# EAGLE board MTRduino_rev5.1 (EAGLE 7.2.0)
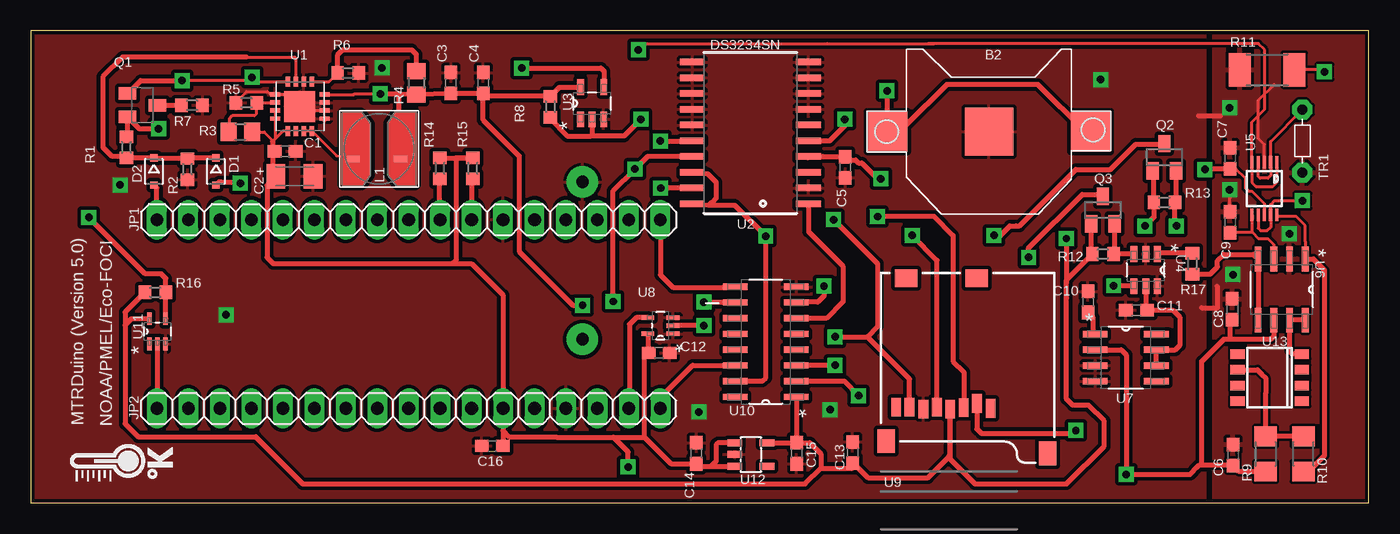
[diagram p0: board, top side]
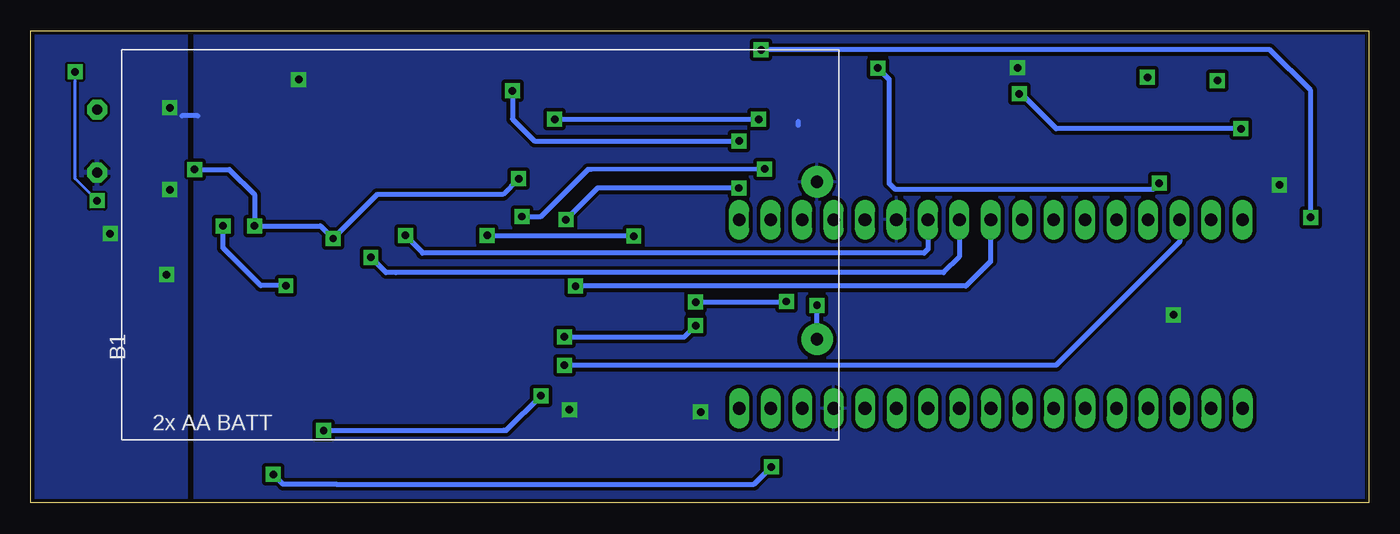
[diagram p1: board, bottom side, seen from below]

Size 107.95 x 38.1 mm. Coordinates in mm from the lower left corner, seen from the top.
Outline: 0,0 107.95,0 107.95,38.1 0,38.1 0,0
Copper layers (1*16): Top 0.035mm / dielectric 1.5mm / Bottom 0.035mm
Design rules "default *": minimum track width 8mil, minimum drill 20mil, track to track 8mil, track to pad 8mil, pad to pad 8mil, via to via 10mil, smd to smd 8mil, copper to edge 12mil, drill to drill 12mil, minimum pad ring 12mil, minimum via ring 12mil, stop-mask expansion 4mil, vias tented up to drill 0mil, thermal gap 10mil

## Footprints (pad centres in the part's own frame; a part is rotated, then mirrored left to right if it is on the bottom)
BATT_AA2 = drill 1 pad 2.54: + -27.178,7.62; - -27.178,-5.08
CR1220-SMD = smd 3.2 x 3.2: +$1 -8.2,0; +$2 8.2,0 | smd 3.9 x 3.9: - 0,0
C0603 = smd 1.1 x 1: 1 -0.85,0; 2 0.85,0
C1206K = smd 1.5 x 2: 1 -1.5,0; 2 1.5,0
SOD323-R = smd 0.6 x 0.6: A 1.1,0; C -1.1,0
1X17 = drill 1.016 long: 1 -20.32,0; 2 -17.78,0; 3 -15.24,0; 4 -12.7,0; 5 -10.16,0; 6 -7.62,0; 7 -5.08,0; 8 -2.54,0; 9 0,0; 10 2.54,0; 11 5.08,0; 12 7.62,0; 13 10.16,0; 14 12.7,0; 15 15.24,0; 16 17.78,0; 17 20.32,0
VLC6045 = smd 1.016 x 0.508: P$2 1.27,3.81; P$3 5.08,3.81
SC59-BEC = smd 1 x 1.4: B -0.95,-1.2; C 0,1.2; E 0.95,-1.2
SOT23 = smd 1 x 1.4: 1 -0.95,-1.1; 2 0.95,-1.1; 3 0,1.1
R0603 = smd 1 x 1.1: 1 -0.85,0; 2 0.85,0
R0805 = smd 1.3 x 1.5: 1 -0.95,0; 2 0.95,0
R1206 = smd 1.6 x 1.803: 1 -1.422,0; 2 1.422,0
R2010 = smd 1.8 x 2.7: 1 -2.2,0; 2 2.2,0
R-5 = drill 0.813 pad 1.6 octagon: 1 -2.54,0; 2 2.54,0
QFN16-4X4 = smd 0.8 x 0.35: 1 -2,0.975; 2 -2,0.325; 3 -2,-0.325; 4 -2,-0.975; 9 2,-0.975; 10 2,-0.325; 11 2,0.325; 12 2,0.975 | smd 0.35 x 0.8: 5 -0.975,-2; 6 -0.325,-2; 7 0.325,-2; 8 0.975,-2; 13 0.975,2; 14 0.325,2; 15 -0.325,2; 16 -0.975,2 | smd 2.5 x 2.5: EXP 0,0
DS3234 = smd 0.53 x 1.98: 1 -5.715,-4.685; 2 -4.445,-4.685; 3 -3.175,-4.685; 4 -1.905,-4.685; 5 -0.635,-4.685; 6 0.635,-4.685; 7 1.905,-4.685; 8 3.175,-4.685; 9 4.445,-4.685; 10 5.715,-4.685; 11 5.715,4.685; 12 4.445,4.685; 13 3.175,4.685; 14 1.905,4.685; 15 0.635,4.685; 16 -0.635,4.685; 17 -1.905,4.685; 18 -3.175,4.685; 19 -4.445,4.685; 20 -5.715,4.685
SOT95P280X145-5N = smd 1.27 x 0.559: 1 -1.295,0.94; 2 -1.295,0; 3 -1.295,-0.94; 4 1.295,-0.94; 5 1.295,0.94
SOT95P280X145-6N = smd 1.27 x 0.559: 1 -1.295,0.94; 2 -1.295,0; 3 -1.295,-0.94; 4 1.295,-0.94; 5 1.295,0; 6 1.295,0.94
MSOP10 = smd 0.25 x 1: 1 -1,-2.113; 2 -0.5,-2.113; 3 0,-2.113; 4 0.5,-2.113; 5 1,-2.113; 6 1,2.113; 7 0.5,2.113; 8 0,2.113; 9 -0.5,2.113; 10 -1,2.113
SOIC127P600X175-8N = smd 1.981 x 0.533: 1 -2.464,1.905; 2 -2.464,0.635; 3 -2.464,-0.635; 4 -2.464,-1.905; 5 2.464,-1.905; 6 2.464,-0.635; 7 2.464,0.635; 8 2.464,1.905
SOT65P210X110-5N = smd 1.016 x 0.356: 1 -1.016,0.66; 2 -1.016,0; 3 -1.016,-0.66; 4 1.016,-0.66; 5 1.016,0.66
MICROSD_1:1 = smd 0.8 x 1.5: 1 5.096,10.919; 2 6.218,10.519; 3 7.274,10.853; 4 8.367,10.982; 5 9.421,10.828; 6 10.539,10.973; 7 11.648,10.819; 8 12.721,10.819 | smd 1.8 x 1.4: CD1 11.92,0.4; CD2 6.22,0.4 | smd 1.4 x 1.9: GND1 0.497,14.55; GND3 13.52,13.55
SOIC127P600X175-16N = smd 1.981 x 0.508: 1 -2.464,4.445; 2 -2.464,3.175; 3 -2.464,1.905; 4 -2.464,0.635; 5 -2.464,-0.635; 6 -2.464,-1.905; 7 -2.464,-3.175; 8 -2.464,-4.445; 9 2.464,-4.445; 10 2.464,-3.175; 11 2.464,-1.905; 12 2.464,-0.635; 13 2.464,0.635; 14 2.464,1.905; 15 2.464,3.175; 16 2.464,4.445
SOT23-DBV = smd 0.55 x 1.2: 1 -0.95,-1.3; 2 0,-1.3; 3 0.95,-1.3; 4 0.95,1.3; 5 -0.95,1.3
S8 = smd 0.762 x 1.143: 1 -1.905,-2.6; 2 -0.635,-2.6; 3 0.635,-2.6; 4 1.905,-2.6; 5 1.905,2.6; 6 0.635,2.6; 7 -0.635,2.6; 8 -1.905,2.6

## Placement (x,y rotation side)
B1  2x AA BATT  [BATT_AA2]  71.69,20.83 180 bottom
B2  RTC Batt  [CR1220-SMD]  77.32,29.97 0 top
C1  2.2  [C0603]  20.52,28.39 0 top
C2  100  [C1206K]  21.27,26.36 0 top
C3  10  [C0603]  33.9,33.9 90 top
C4  0.1  [C0603]  36.5,33.9 90 top
C5  0.1  [C0603]  65.72,27.09 270 top
C6  0.1  [C0603]  97,3.86 270 top
C7  0.1  [C0603]  96.77,27.81 270 top
C8  10  [C0603]  96.95,15.62 270 top
C9  0.1  [C0603]  96.77,22.66 270 top
C10  0.1  [C0603]  85.32,16.22 90 top
C11  4.7  [C0603]  89.22,15.56 180 top
C12  0.1  [C0603]  50.7,12.1 0 top
C13  0.1  [C0603]  66.32,4.05 90 top
C14  1.0  [C0603]  53.7,4 90 top
C15  1.0  [C0603]  61.8,4 270 top
C16  0.1  [C0603]  37.24,4.6 180 top
D1  BAT46JFILM  [SOD323-R]  14.93,26.75 270 top
D2  BAT46JFILM  [SOD323-R]  9.92,26.75 270 top
JP1  MicroA  [1X17]  30.48,22.86 0 top
JP2  MicroB  [1X17]  30.48,7.62 180 top
L1  6.8uH  [VLC6045]  31.1,31.57 180 top
Q1  MMUN2133LT1  [SC59-BEC]  9,32.1 270 top
Q2  BSS138  [SOT23]  91.47,27.91 0 top
Q3  BSS138  [SOT23]  86.51,23.64 0 top
R1  340K  [R0603]  7.7,28.7 270 top
R2  10K  [R0603]  12.63,26.94 270 top
R3  1.87M  [R0805]  16.89,29.95 0 top
R4  1.87M  [R0805]  31.1,33.9 270 top
R5  200K  [R0603]  17.4,32.3 0 top
R6  340K  [R0603]  25.6,34.7 180 top
R7  1K  [R0603]  13,32.1 180 top
R8  10K  [R0603]  41.92,31.98 90 top
R9  200k  [R1206]  99.64,3.94 90 top
R10  324k  [R1206]  102.69,3.94 270 top
R11  50K**  [R2010]  99.75,34.96 0 top
R12  3.74k  [R0603]  86.51,20.09 180 top
R13  3.74k  [R0603]  91.47,24.25 180 top
R14  3.74k  [R0603]  32.99,27 90 top
R15  3.74k  [R0603]  35.65,27 90 top
R16  10K  [R0603]  10.03,16.99 0 top
R17  10K  [R0603]  93.73,19.3 90 top
TR1  50K  [R-5]  102.62,29.21 270 top
U1  TPS61090  [QFN16-4X4]  21.7,32 90 top
U2  DS3234SN  [DS3234]  58.06,29.87 90 top
U3  NC7S14  [SOT95P280X145-5N]  45.29,32.26 90 top
U4  ADS1100  [SOT95P280X145-6N]  89.97,18.79 270 top
U5  ADG836  [MSOP10]  99.54,25.37 180 top
U6  LT1013  [SOIC127P600X175-8N]  100.94,17.22 270 top
U7  MAX6126  [SOIC127P600X175-8N]  88.36,11.71 0 top
U8  74VHC1  [SOT65P210X110-5N]  50.8,14.3 180 top
U9  microSD Card  [MICROSD_1:1]  82.55,18.54 180 top
U10  CD74HC4050  [SOIC127P600X175-16N]  59.3,13 180 top
U11  NL17SZ07  [SOT65P210X110-5N]  10.21,13.84 90 top
U12  LP5907  [SOT23-DBV]  58.1,3.9 270 top
U13  LT1634  [S8]  99.97,10.11 90 top
U$1  MTRLOGO  [MTRLOGO]  11.68,1.52 90 top

## Library data of the parts
B1 B2 Q2 Q3 = adafruit
C1 C3-C16 = rcl
C2 L1 R1-R17 = resistor
D1 D2 = diode
JP1 JP2 = pinhead
Q1 = transistor-pnp
TR1 = discrete
U1 = microchip
U2 = SparkFun-FreqCtrl
U3 = Texas Instruments_By_element14_Batch_1; MPN: 1P1G14MDBVREPG4; OC_FARNELL: -; OC_NEWARK: 56P2415; PACKAGE: SOT-23-5; SUPPLIER: Texas Instruments
U4 = Texas Instruments_By_element14_Batch_1; MPN: ADS1100A0IDBVT; OC_FARNELL: 1135959; OC_NEWARK: 20H0708; PACKAGE: SOT-23-6; SUPPLIER: Texas Instruments
U5 = analog-devices
U6 = LTC_By_element14_Batch_1; MPN: LT1013DS8#PBF; OC_FARNELL: 9559302; OC_NEWARK: 57M0827; PACKAGE: SOIC-8; SUPPLIER: LINEAR TECHNOLOGY
U7 = Maxim_By_element14_Batch_1
U8 = ON Semiconductor_By_element14_Batch_1; MPN: M74VHC1GT125DF1G; OC_FARNELL: 1567363; OC_NEWARK: 83H7591; PACKAGE: SOT-23-5; SUPPLIER: ON SEMICONDUCTOR
U9 = SparkFun-Connectors; PROD_ID: CONN-07820
U10 = ST Microelctronics_By_element14_Batch_1; MPN: M74HC4050RM13TR; OC_FARNELL: 1261257; OC_NEWARK: 89K0905; PACKAGE: SOIC-16; SUPPLIER: STMICROELECTRONICS
U11 = ON Semiconductor_By_element14_Batch_1; MPN: NL17SZ07DFT2G; OC_FARNELL: 1705431; OC_NEWARK: 04R7799; PACKAGE: SOT-353-5; SUPPLIER: ON Semiconductor
U12 = texas; MF: TEXAS INSTRUMENTS; MPN: TPS77030DBVT; OC_FARNELL: 1207348; OC_NEWARK: 77C1185
U13 = linear-technology
U$1 = SparkFun-Passives

## Nets
+3V3: C5.1 C7.2 C13.1 C15.1 Q2.1 Q3.1 R12.2 R13.2 R16.1 U2.4 U5.8 U9.4 U10.1 U11.5 U12.5
+5V: C1.1 C2.1 C6.2 C8.2 C12.1 C14.1 C16.1 JP2.6 R3.2 R9.1 R14.2 R15.2 U1.1 U1.15 U1.16 U6.6 U7.2 U8.5 U12.1 U12.3
GND: B1.- B2.- C1.2 C2.2 C3.2 C4.2 C5.2 C6.1 C7.1 C8.1 C9.1 C10.2 C11.2 C12.2 C13.2 C14.2 C15.2 C16.2 JP1.12 JP2.4 R2.2 R5.1 R6.1 R7.1 R11.1 TR1.2 U1.5 U1.6 U1.7 U1.10 U1.13 U1.EXP U2.2 U2.7 U2.8 U2.9 U2.10 U2.11 U2.12 U2.13 U2.14 U2.15 U3.3 U4.2 U4.6 U5.3 U6.2 U7.3 U7.4 U8.1 U8.3 U9.6 U10.8 U11.3 U12.2
MISO_3V3: U2.19 U8.2 U9.7
MISO_5V: JP2.2 U8.4
MOSI_3V3: U2.17 U9.3 U10.10
MOSI_5V: JP1.17 U10.9
N$1: D1.A U3.4
N$2: C9.2 U5.6 U6.3
N$3: R17.2 U4.1
N$4: C10.1 U7.1
N$5: R17.1 U6.4 U6.5
N$6: B2.+$1 B2.+$2 U2.16
N$7: L1.P$3 U1.3 U1.4
N$8: R9.2 R10.1 U13.6
N$9: TR1.1 U5.2 U5.4
N$10: R11.2 U5.7 U5.9
N$11: R4.1 R6.2 U1.9
N$12: Q1.C R7.2
N$13: R3.1 R5.2 U1.14
N$14: U6.7 U6.8 U13.4
N$16: R10.2 U5.10 U6.1
N$17: R8.1 U2.5 U3.2
N$19: Q1.B U1.12
N$21: D2.A JP1.1
N$38: C11.1 U4.5 U7.6 U7.7
RTC_CS_3V3: U2.1 U10.6
RTC_CS_5V: JP1.9 U10.7
SCK_3V3: U2.18 U2.20 U9.5 U10.15
SCK_5V: JP2.1 U10.14
SCL3V3: Q3.2 R12.1 U4.3
SCL_5V: JP1.10 Q3.3 R14.1
SD_CS_3V3: U9.2 U10.2
SD_CS_5V: JP1.3 U10.3
SDA3V3: Q2.2 R13.1 U4.4
SDA_5V: JP1.11 Q2.3 R15.1
SHUTDOWN: D1.C D2.C R1.2 R2.1 U1.11
TEMP_3V3: R16.2 U5.1 U5.5 U11.4
TEMP_5V: JP2.17 U11.2
V+: B1.+ C3.1 C4.1 L1.P$2 Q1.E R1.1 R4.2 R8.2 U1.8 U3.5

## Tracks (layer width: path | path; a pad name or v marks a point on that pad's centre or on a via)
+3V3  (via drill 0.6)
  Top 0.254: U5.8 99.54,24.16 99.31,24.38 99.06,24.64 98.55,25.15 98.3,25.15 98.04,25.4 98.04,26.16 97.24,26.96 C7.2
  Top 0.406: U10.1 61.8,8.52 C15.1 | U2.4 62.68,27.87 62.75,27.94 65.79,27.94 66.04,27.69 66.55,27.69 66.8,27.43 67.06,27.43 68.33,26.16 v68.58,26.16 | U12.5 C15.1 | C15.1 62.85,4.85 63.75,3.95 63.75,2.79 | 62.67,27.86 U2.4 | U11.5 8.1,14.86 7.59,14.35 | 7.59,14.35 7.59,6.38 8.64,5.33 18.14,5.33 21.95,1.52 62.48,1.52 63.75,2.79 | 62.68,27.87 U2.4 | R16.1 7.59,15.4 7.59,14.35 | U2.4 63.91,27.96 65.69,27.96 C5.1 | 63.75,2.79 66.32,2.79 C13.1 66.39,3.2 67.56,2.03 72.39,2.03 73.91,3.56 74.18,3.83 U9.4 74.18,3.54 76.2,1.52 83.57,1.52 86.61,4.57 86.61,6.6 85.34,7.87 84.07,7.87 83.57,8.38 83.57,16.51 83.57,17.78 | 83.57,17.78 83.57,17.99 83.71,18.14 R12.2 85.56,20.19 Q3.1 | Q2.1 90.62,26.71 R13.2 90.62,23.06 v89.92,22.35 | C7.2 94.78,26.96 v94.74,26.92 | v83.57,21.34 83.57,17.78
  Bottom 0.406: v94.74,26.92 91.95,26.92 89.92,24.89 v89.92,22.35 84.58,22.35 v83.57,21.34 80.01,24.89 79.5,24.89 78.23,24.89 69.85,24.89 v68.58,26.16
+5V  (via drill 0.6)
  Top 0.254: 20.35,30 U1.1 20.35,30 | 20.35,30 20.3,30 19.7,29.4 | U1.15 U1.16 19.7,29.4 | 19.7,29.4 19.5,29.2 | 20.35,30 19.56,29.21 | 19.56,29.21 19.56,26.42 | R3.2 18.82,29.95 19.56,29.21
  Top 0.406: 19.5,29.2 19.5,28.05 | 54.9,2.95 53.9,2.95 C14.1 51.65,3.15 49.5,5.3 | 54.9,2.95 U12.3 | 49.5,5.3 49.5,11.85 49.6,11.85 C12.1 49.85,13.57 U8.5 | 47,5.3 49.5,5.3 | U12.1 55.45,4.85 55.3,4.7 55.3,3.35 54.9,2.95 | C1.1 19.5,28.05 | v48.2,2.9 48.2,4.1 47,5.3 | 47,5.3 42.4,5.3 38.64,5.3 38.1,5.84 | 19.5,28.05 19.5,26.47 C2.1 | R14.2 34.29,27.85 R15.2 34.3,27.85 34.29,27.84 34.29,19.56 34.04,19.3 | 19.56,26.42 19.05,25.65 19.05,19.81 19.56,19.3 34.04,19.3 | U6.6 100.31,13.44 100.08,13.21 96.77,13.21 | 96.77,13.21 96.27,13.21 96.01,12.95 94.49,11.43 94.49,3.23 94.14,2.88 | C8.2 96.77,14.59 96.77,13.21 | 34.04,19.3 35.56,19.3 38.1,16.76 JP2.6 38.1,5.84 | 38.1,5.84 C16.1 | U7.2 87.98,12.35 88.39,11.94 v88.39,2.29 93.55,2.29 94.14,2.88 | R9.1 97.5,2.52 C6.2 94.27,3.01 94.14,2.88
  Bottom 0.406: v48.2,2.9 49.6,1.5 83.32,1.5 87.61,1.5 v88.39,2.29
GND  (via drill 0.6)
  Top 0.254: U1.6 22.02,31.68 U1.EXP 20.73,32.98 U1.13 19.32,32.98 19.1,33.2 17.4,33.2 16.5,32.3 16.4,32.4 16.45,32.4 R5.1 | C9.1 96.77,24.64 | U5.3 99.54,28.93 99.06,29.41 99.06,32.51 100.33,33.78
  Top 0.406: U1.5 23.7,30.9 | 95.73,17.49 95.76,15.75 94.49,15.75 | 94.23,31.24 96.01,31.24
  Bottom 0.406: 46.04,30.8 46.04,30.48 | 94.49,31.24 95.76,31.24
  other vias: 15.74,15.18 7.18,25.66 28.33,35.13 53.9,7.33 64.49,7.51 101.57,21.73 86.33,34.18 96.75,25.29 97,18.43 96.75,31.89
  pour Top (isolate 0.305): -1.96,39.55 94.74,39.29 94.74,-0.36 -1.93,-0.36 -1.93,39.42
  pour Bottom (isolate 0.305): -1.96,39.55 94.74,39.55 94.74,-0.36 -1.93,-0.36 -1.93,39.42
  pour Top: 95.5,38.86 95.5,-0.51 109.98,-0.51 109.98,38.86
  pour Bottom: 95.5,38.86 95.5,-0.51 109.98,-0.51 109.98,38.86
MISO_3V3  (via drill 0.6)
  Top 0.406: v64.9,13.4 67.5,13.4 | v54.3,14.3 U8.2 | U2.19 v50.83,25.41 50.8,25.41 | v64.77,22.86 68.33,19.3 68.33,14.22 67.5,13.4 | U9.7 70.9,10 67.5,13.4
  Bottom 0.406: v64.9,13.4 55.2,13.4 v54.3,14.3 | v50.83,25.41 62.22,25.41 v64.77,22.86
MISO_5V
  Top 0.406: U8.4 48.86,14.96 48.3,14.4 48.3,7.66 JP2.2
MOSI_3V3  (via drill 0.6)
  Top 0.406: U10.10 54.33,16.18 v54.3,16.2 | U2.17 49.76,27.96 v48.74,26.95 46.99,25.2 v46.99,16.26 | U9.3 75.28,10.58 74.42,11.43 74.42,21.59 72.9,23.11 v68.33,23.11
  Bottom 0.406: v48.74,26.95 62.74,26.92 62.99,26.92 66.67,23.24 | 66.67,23.24 66.8,23.11 | v54.3,16.2 47.05,16.2 v46.99,16.26 | v68.33,23.11 66.8,23.11 | 66.8,23.11 66.67,23.24
MOSI_5V
  Top 0.406: JP1.17 50.8,18.4 51.8,17.4 56.79,17.4 U10.9
N$1  (via drill 0.6)
  Top 0.406: U3.4 46.25,33.58 46.25,34.85 46,35.1 v39.6,35.1 | v16.9,25.8 16.8,25.9 15.34,25.9 15.18,25.9 D1.A
  Bottom 0.406: v16.9,25.8 17.4,25.3 38.2,25.3 38.7,25.8 38.7,34.2 v39.6,35.1
N$2
  Top 0.254: 98.55,21.84 98.55,22.86 | 98.55,22.86 98.55,23.25 | 98.55,21.84 99.06,21.34 99.82,21.34 100.31,20.85 U6.3 | C9.2 96.81,21.84 98.55,21.84 | 98.55,23.25 98.55,22.86 | 98.55,22.86 98.55,23.25 | 98.55,23.25 U5.6
N$3
  Top 0.406: R17.2 90.97,20.15 U4.1
N$4
  Top 0.406: U7.1 85.73,13.79 85.73,14.96 C10.1
N$5
  Top 0.406: U6.5 U6.4 98.65,20.07 96.27,20.07 95.76,19.56 95.76,19.05 95.16,18.45 R17.1
N$6  (via drill 0.6)
  Top 0.406: B2.+$2 85.09,29.97 81.28,33.78 73.91,33.78 70.61,30.48 69.64,30.48 B2.+$1 69.12,33.24 v69.09,33.27 | v50.8,29.21 53.35,29.21 U2.16
  Bottom 0.406: v69.09,33.27 69.09,30.99 67.31,29.21 v50.8,29.21
N$7
  Top 0.254: U1.3 U1.4 24.66,28.02 L1.P$3
N$8
  Top 0.406: U13.6 97.71,10.74 98.98,10.74 99.31,10.41 99.64,10.08 99.64,8.81 R9.2 R10.1
N$9
  Top 0.254: U5.4 99.04,26.36 99.19,26.21 99.84,26.21 100.04,26.42 | 100.04,26.42 U5.2 100.04,29.18 TR1.1 | 100.04,26.42 100.03,26.42
N$10  (via drill 0.6)
  Top 0.254: U5.7 99.04,22.17 99.24,21.97 99.77,21.97 100.04,22.24 U5.9 100.04,24.1 100.33,24.38 v102.62,24.38 | v104.39,34.8 104.23,34.96 R11.2
  Bottom 0.254: v102.62,24.38 104.39,26.16 v104.39,34.8
N$11
  Top 0.254: U1.9 24.05,34 R6.2
  Top 0.406: R6.2 24.75,36.18 25.15,36.58 30.73,36.58 31.1,36.21 R4.1
N$12
  Top 0.406: Q1.C R7.2
N$13
  Top 0.254: U1.14 19.68,32.3 R5.2 18.2,32.25 18.2,31.41 18.03,31.24 16.26,31.24 16,30.99 16,30.26 R3.1
N$14
  Top 0.406: U6.8 U6.7 101.58,12.25 101.81,12.01 U13.4
N$16
  Top 0.254: U6.1 102.84,21.11 102.84,22.38 102.11,23.11 100.69,23.11 U5.10
  Top 0.406: U6.1 103.5,19.68 104.14,19.05 104.39,18.8 104.39,3.81 103.1,2.52 R10.2
N$17  (via drill 0.6)
  Top 0.406: 45.21,29.62 43.28,29.62 41.92,30.98 R8.1 | U3.2 45.29,29.69 45.21,29.62 | v49.23,30.96 47.88,29.62 45.21,29.62 | U2.5 64.47,29.23 65.68,30.45 v65.68,30.96
  Bottom 0.406: v65.68,30.96 v49.23,30.96
N$19  (via drill 0.6)
  Top 0.254: U1.12 18.2,34 v17.85,34.35 17.59,34.1 v12.2,34.1
  Top 0.406: Q1.B 8.85,34.1 v12.2,34.1
N$21
  Top 0.406: JP1.1 10.16,25.42 D2.A
N$38
  Top 0.406: U7.6 U7.7 92.36,12.35 92.71,12.7 92.71,14.99 92.14,15.56 C11.1 89.97,15.66 U4.5
RTC_CS_3V3
  Top 0.406: U10.6 64.2,14.9 65.54,16.24 65.53,16.25 65.53,19.1 62.75,21.88 U2.1
RTC_CS_5V  (via drill 0.6)
  Top 0.406: v64,17.5 64,16.7 63.5,16.2 61.79,16.2 U10.7
  Bottom 0.406: v64,17.5 32.5,17.5 30.48,19.52 JP1.9
SCK_3V3  (via drill 0.6)
  Top 0.406: 54.71,24.03 54.94,24.26 54.97,24.26 55.3,24.59 55.3,25.88 54.61,26.57 U2.18 | U10.15 59.02,9.82 59.3,10.1 v59.3,21.52 56.79,24.03 54.71,24.03 | U2.20 54.71,24.03 | U9.5 73.13,19.58 v71.12,21.59
  Bottom 0.406: 59.32,21.5 v59.3,21.52 59.37,21.59 v71.12,21.59
SCK_5V
  Top 0.406: U10.14 53.4,11.1 50.8,8.5 JP2.1
SCL3V3
  Top 0.406: Q3.2 87.46,20.19 R12.1 U4.3
SCL_5V  (via drill 0.6)
  Top 0.406: 33.02,22.3 JP1.10 32.99,22.89 R14.1 | v80.52,19.81 80.52,20.57 84.84,24.89 86.36,24.89 Q3.3
  Bottom 0.406: JP1.10 33.02,19.86 34.29,18.59 78.51,18.59 79.3,18.59 v80.52,19.81
SD_CS_3V3  (via drill 0.6)
  Top 0.406: U9.2 76.33,5.96 76.45,5.84 76.71,5.59 84.07,5.59 v84.33,5.84 | U10.2 65.61,9.82 v66.8,8.64
  Bottom 0.406: v84.33,5.84 69.85,5.84 | 69.85,5.84 69.69,5.84 | v66.8,8.64 69.6,5.84 69.85,5.84
SD_CS_5V  (via drill 0.6)
  Top 0.406: v64.9,11.1 v64.89,11.1 U10.3
  Bottom 0.406: 30.7,11.1 31.24,11.1 | 31.24,11.1 v64.9,11.1 | JP1.3 15.24,21.08 25.15,11.18 25.22,11.1 31.24,11.1
SDA3V3  (via drill 0.6)
  Top 0.406: v92.46,22.35 92.32,22.48 R13.1 92.42,24.35 Q2.2 | U4.4 87.41,17.49 v87.38,17.53
  Bottom 0.406: v92.46,22.35 92.46,20.57 89.41,17.53 v87.38,17.53
SDA_5V  (via drill 0.6)
  Top 0.406: JP1.11 35.6,22.9 35.6,26.15 R15.1 | v77.72,21.59 78.23,21.59 78.99,22.35 79.5,22.35 79.76,22.35 84.33,26.92 87.12,26.92 89.15,28.96 91.42,28.96 Q2.3
  Bottom 0.406: JP1.11 35.56,20.47 35.87,20.17 76.38,20.17 76.38,20.25 v77.72,21.59
SHUTDOWN
  Top 0.254: 17.4,36 21.3,36 21.38,35.92 U1.11
  Top 0.406: 17.4,36 7.4,36 5.8,34.4 5.8,28.7 6.5,28 7.55,28 R1.2 D2.C 9.98,27.79 R2.1 12.69,27.85 D1.C
TEMP_3V3  (via drill 0.6)
  Top 0.254: U5.1 100.54,25.87 100.23,25.55 98.86,25.55 98.54,25.87 U5.5 98.54,30.74 99.57,31.77 99.57,36.07 99.57,36.58 99.06,37.08 95.76,37.08 72.39,37.08 | v49.02,36.58 49.53,37.08 64.26,37.08 72.39,37.08 | 72.39,37.08 72.9,37.08
  Top 0.406: U11.4 10.88,14.87 R16.2 10.88,18.12 10.52,18.49 9.22,18.49 v4.67,23.04
  Bottom 0.406: v4.67,23.04 4.67,33.3 7.95,36.58 v49.02,36.58
TEMP_5V
  Top 0.406: U11.2 10.21,7.67 JP2.17
V+  (via drill 0.6)
  Top 0.254: U1.8 26.07,32.98 26.12,33.02 v28.19,33.02
  Top 0.406: R1.1 7.8,29.65 Q1.E 8.75,30.2 v10.3,30.2 | C4.1 36.5,30.9 39.4,28 39.4,20.3 43.75,15.95 v44.51,15.95 | C4.1 C3.1 R4.2 29.72,33.05 | L1.P$2 29.72,28.13 29.72,33.05 | v28.19,33.02 28.22,33.05 29.72,33.05 | C4.1 36.72,32.83 R8.2 42.65,33.55 U3.5
  Bottom 0.406: v10.3,30.2 25.2,30.2 28.02,33.02 v28.19,33.02 | B1.+ v44.51,15.95

## Text on the board
tNames: + | MTRDuino (Version 5.0) | NOAA/PMEL/Eco-FOCI
tValues: 12 | 11 | 10 | 9 | 8 | 7 | 6 | 5 | 4 | 3 | 2 | RS | RX | TX | SS | GND | MOSI | 13 | 3V | AREF | A0 | A1 | A2 | A3 | A4 | A5 | NC | NC | +5V | RS | VIN | MISO | SCK | GND